# EAGLE board LandingGearSchematic_4 (EAGLE 9.5.1)
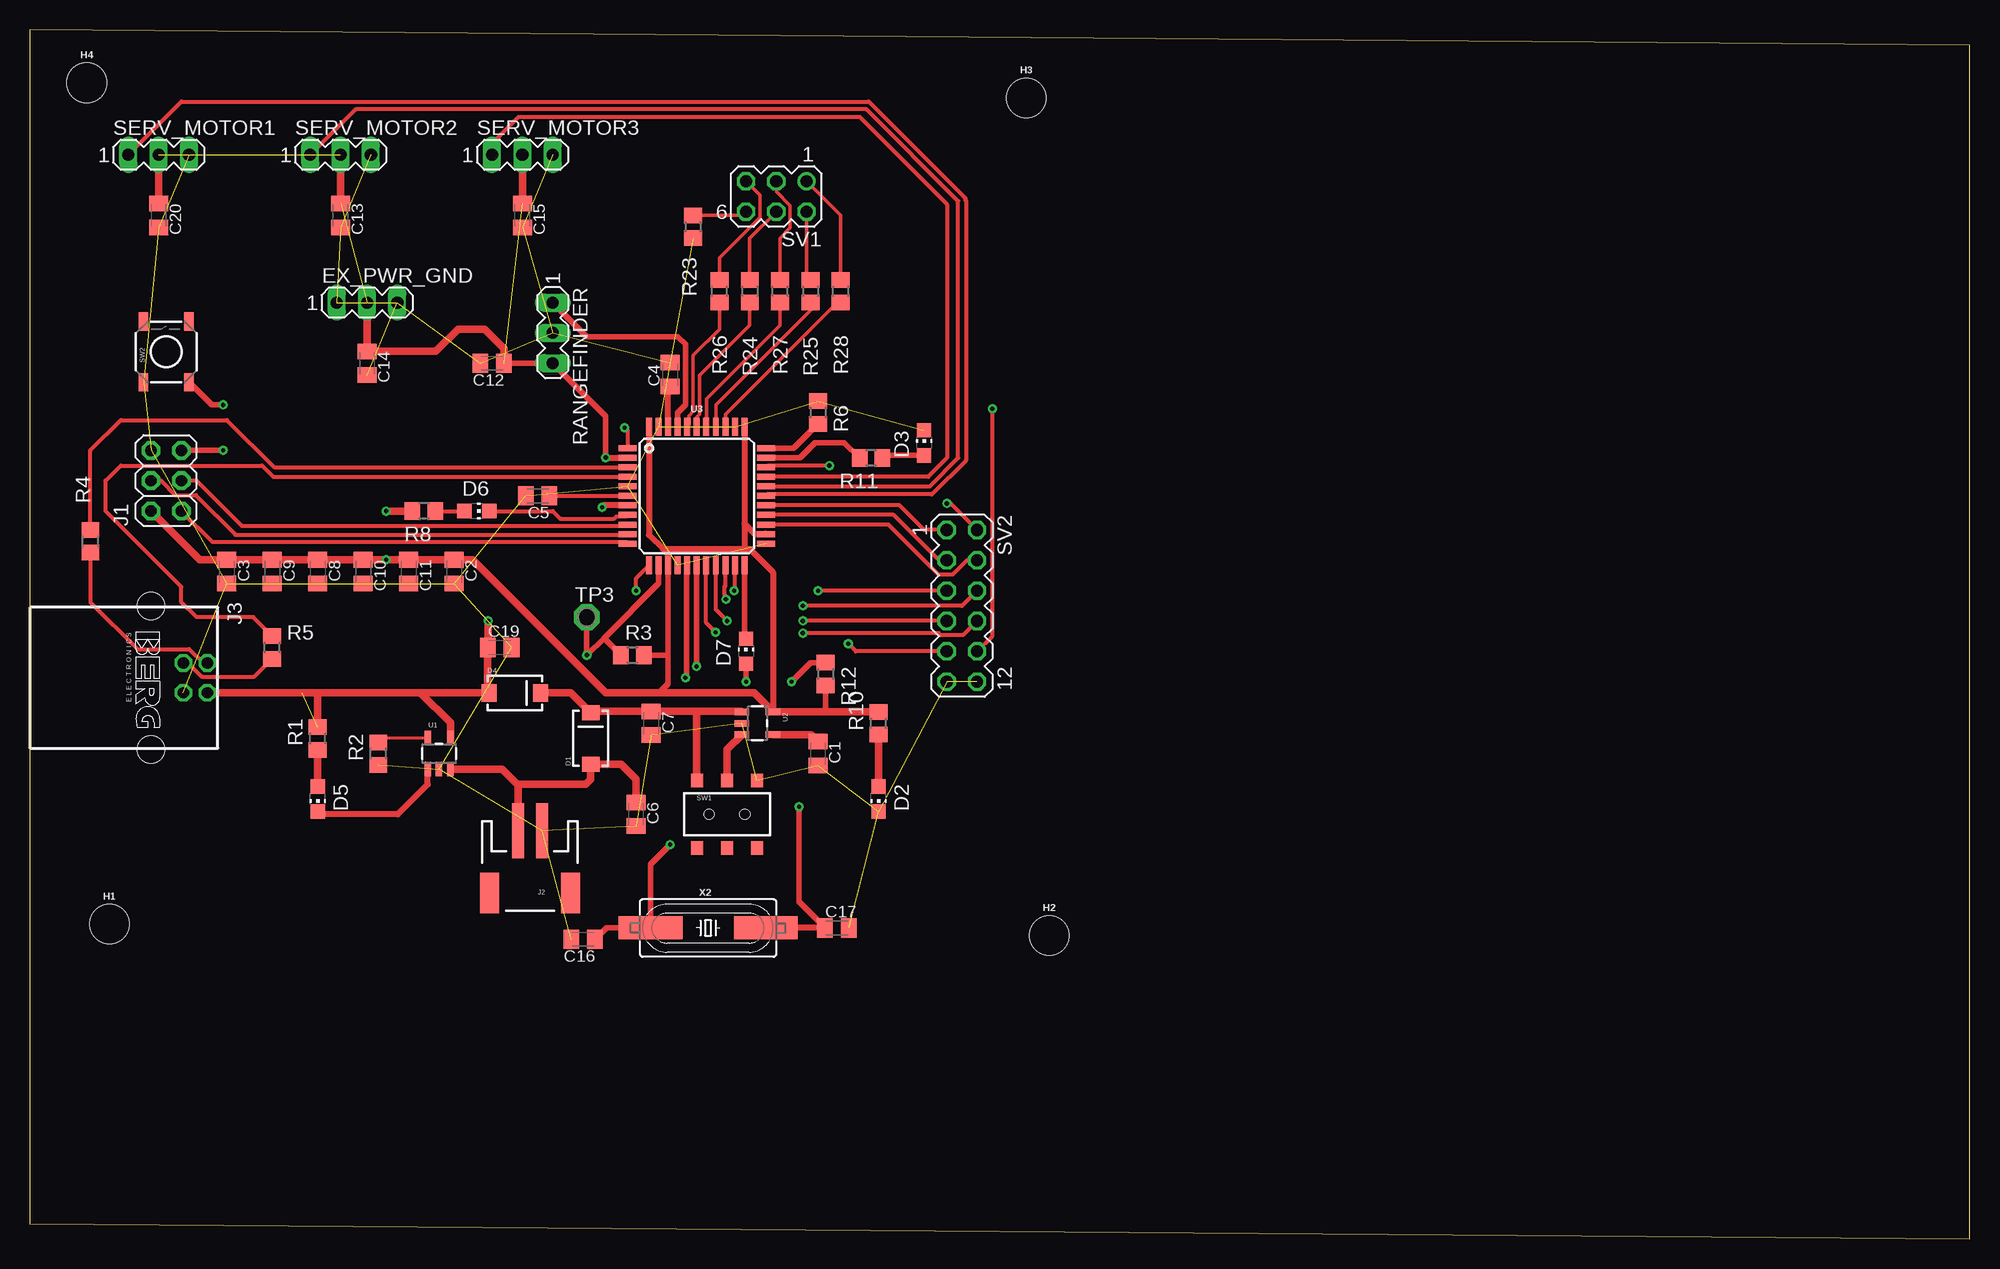
[diagram p0: board, top side]
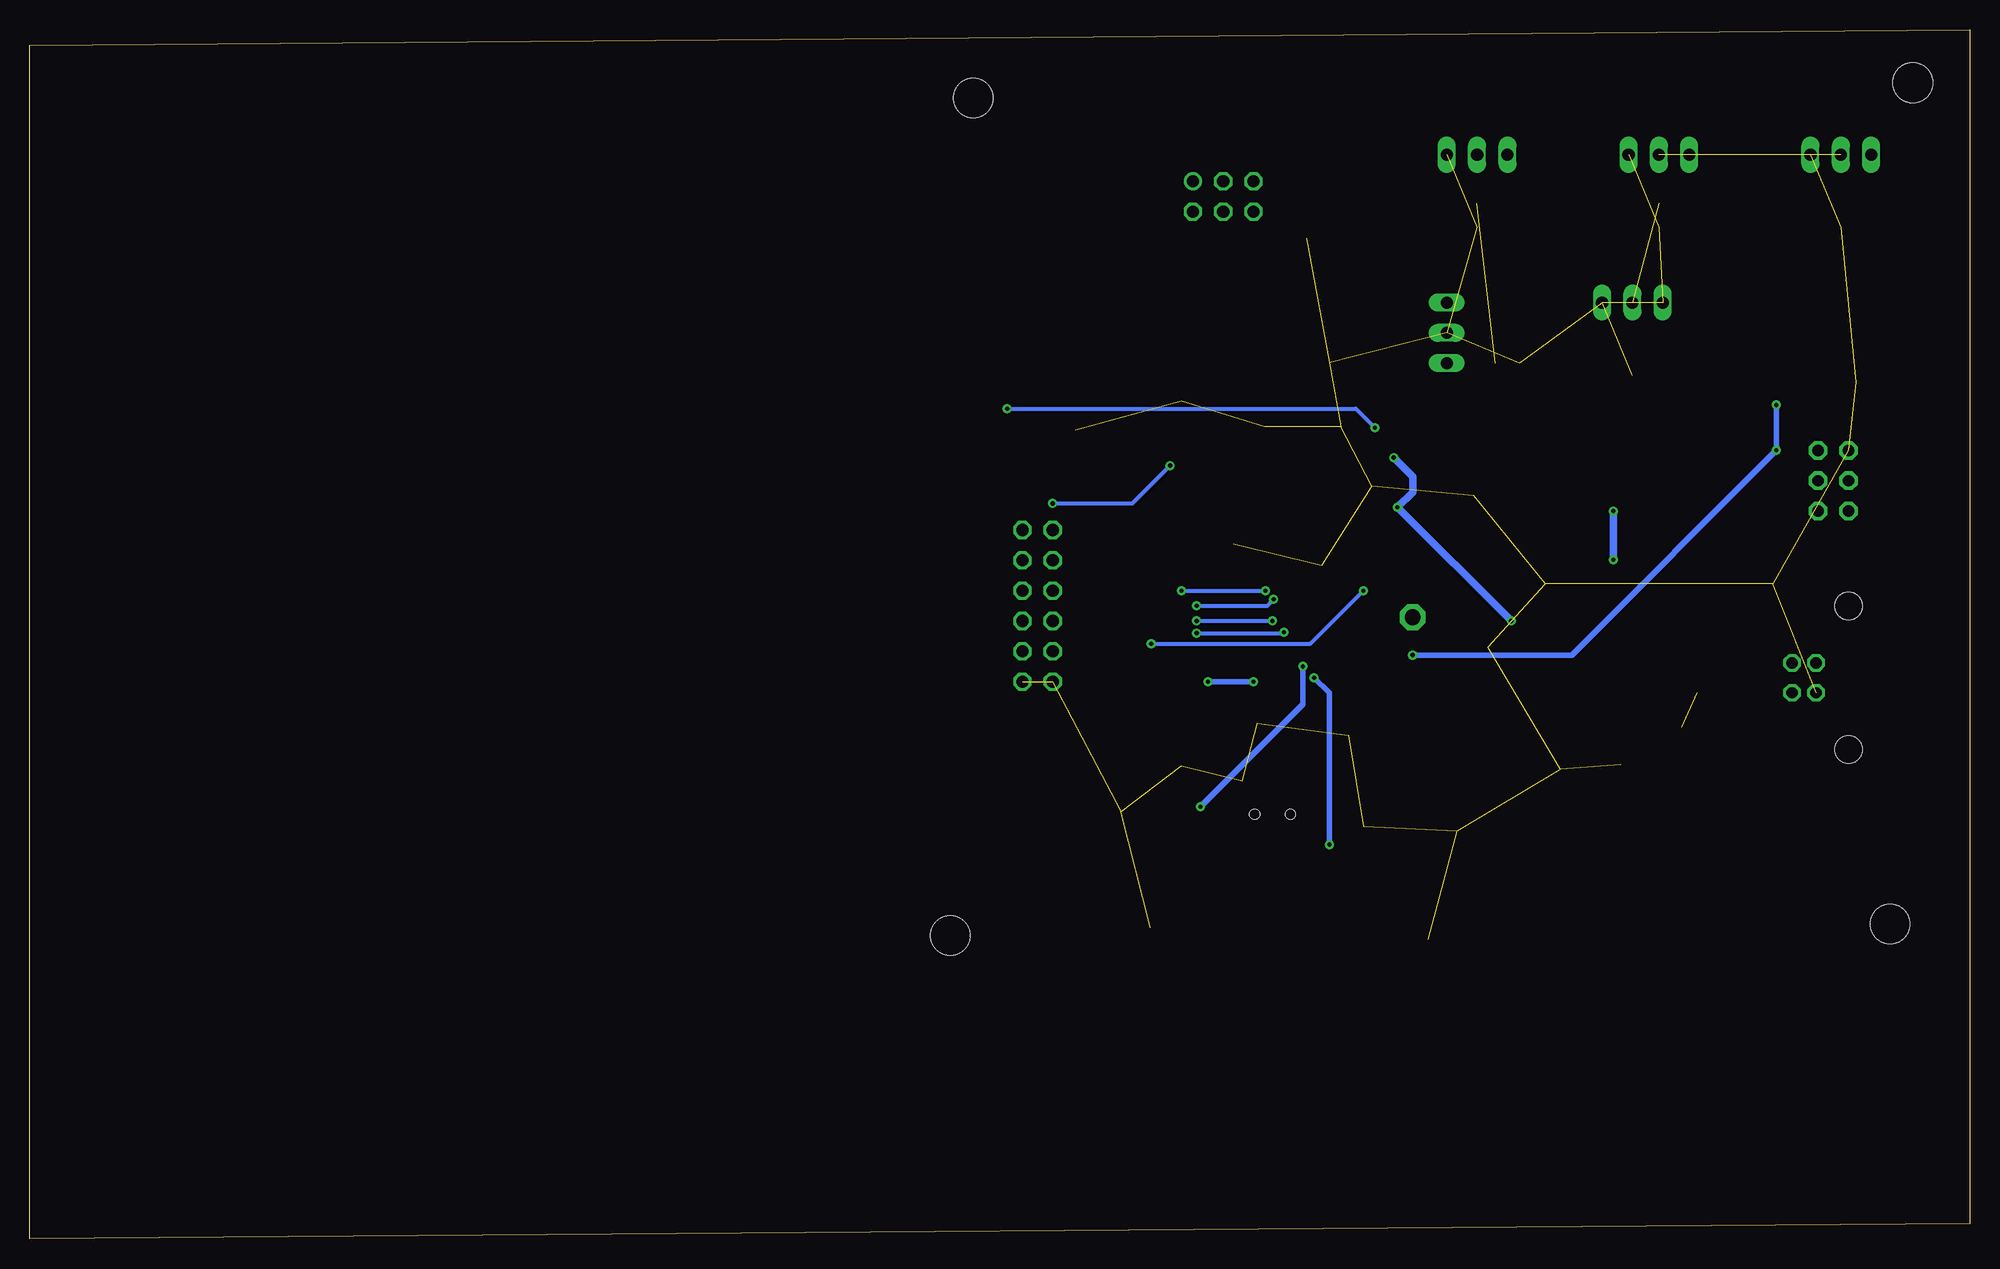
[diagram p1: board, bottom side, seen from below]

Size 162.54 x 101.27 mm. Coordinates in mm from the lower left corner, seen from the top.
Outline: 0,1.27 162.54,0 162.54,100 0,101.27 0,1.27
Copper layers (1*16): Top 0.035mm / dielectric 1.5mm / Bottom 0.035mm
Design rules "default": minimum track width 6mil, minimum drill 0.35mm, track to track 6mil, track to pad 6mil, pad to pad 6mil, via to via 6mil, smd to smd 6mil, copper to edge 40mil, drill to drill 6mil, minimum pad ring 10mil, minimum via ring 8mil, stop-mask expansion 4mil, vias tented up to drill 0mil, thermal gap 10mil
Net classes: 0 default: width 0.254 mm, clearance 0.254 mm; 1 power: width 0.61 mm, drill 0.61 mm, clearance 0.254 mm

## Footprints (pad centres in the part's own frame; a part is rotated, then mirrored left to right if it is on the bottom)
C0805K = smd 1.3 x 1.6: 1 -1,0; 2 1,0
SMA-DIODE = smd 1.27 x 1.47: A -2.15,0; C 2.15,0
CHIP-LED0805 = smd 1.2 x 1.2: A 0,-1.05; C 0,1.05
MA03-1 = drill 1.016 long: 1 -2.54,0; 2 0,0; 3 2.54,0
STAND-OFF = hole 3.302: 0,0
2X03 = drill 0.95 pad 1.55 octagon: 1 -2.54,-1.27; 2 -2.54,1.27; 3 0,-1.27; 4 0,1.27; 5 2.54,-1.27; 6 2.54,1.27
JST-2-SMD = smd 1 x 4.6: 1 -1,-3.7; 2 1,-3.7 | smd 1.6 x 3.4: NC1 -3.4,1.5; NC2 3.4,1.5
PN61729 = drill 0.95 octagon: 1 1.25,4.71; 2 -1.25,4.71; 3 -1.25,2.71; 4 1.25,2.71 | hole 2.3: -6.02,0; 6.02,0
R0805 = smd 1.3 x 1.5: 1 -0.95,0; 2 0.95,0
MA03-2 = drill 1.016: 1 -2.54,-1.27 | drill 1.016 octagon: 2 -2.54,1.27; 3 0,-1.27; 4 0,1.27; 5 2.54,-1.27; 6 2.54,1.27
MA06-2 = drill 1.016 octagon: 1 -6.35,-1.27; 2 -6.35,1.27; 3 -3.81,-1.27; 4 -3.81,1.27; 5 -1.27,-1.27; 6 -1.27,1.27; 7 1.27,-1.27; 8 1.27,1.27; 9 3.81,-1.27; 10 3.81,1.27; 11 6.35,-1.27; 12 6.35,1.27
AYZ0202 = smd 1 x 1.15: 1 -2.5,2.825; 2 0,2.825; 3 2.5,2.825; 4 -2.5,-2.825; 5 0,-2.825; 6 2.5,-2.825 | hole 0.85: 1.5,0; -1.5,0
TACTILE_SWITCH_SMD = smd 1.524 x 0.762: 1 -2.54,1.905; 2 2.54,1.905; 3 -2.54,-1.905; 4 2.54,-1.905
P1-13 = drill 1.321 pad 2.159 octagon: TP 0,0
SOT23-5 = smd 0.55 x 1.2: 1 -0.95,-1.3; 2 0,-1.3; 3 0.95,-1.3; 4 0.95,1.3; 5 -0.95,1.3
TQFP44 = smd 1.5 x 0.5: 1 -5.8,4; 2 -5.8,3.2; 3 -5.8,2.4; 4 -5.8,1.6; 5 -5.8,0.8; 6 -5.8,0; 7 -5.8,-0.8; 8 -5.8,-1.6; 9 -5.8,-2.4; 10 -5.8,-3.2; 11 -5.8,-4; 23 5.8,-4; 24 5.8,-3.2; 25 5.8,-2.4; 26 5.8,-1.6; 27 5.8,-0.8; 28 5.8,0; 29 5.8,0.8; 30 5.8,1.6; 31 5.8,2.4; 32 5.8,3.2; 33 5.8,4 | smd 0.5 x 1.5: 12 -4,-5.8; 13 -3.2,-5.8; 14 -2.4,-5.8; 15 -1.6,-5.8; 16 -0.8,-5.8; 17 0,-5.8; 18 0.8,-5.8; 19 1.6,-5.8; 20 2.4,-5.8; 21 3.2,-5.8; 22 4,-5.8; 34 4,5.8; 35 3.2,5.8; 36 2.4,5.8; 37 1.6,5.8; 38 0.8,5.8; 39 0,5.8; 40 -0.8,5.8; 41 -1.6,5.8; 42 -2.4,5.8; 43 -3.2,5.8; 44 -4,5.8
HC49UP = smd 5.334 x 1.93: 1 -4.826,0; 2 4.826,0

## Placement (x,y rotation side)
C1  470p  [C0805K]  66.04,40.64 270 top
C2  100n  [C0805K]  35.56,55.88 270 top
C3  100n  [C0805K]  16.51,55.88 270 top
C4  100n  [C0805K]  53.66,72.39 90 top
C5  1u  [C0805K]  42.55,62.23 180 top
C6  4.7u  [C0805K]  50.8,35.56 270 top
C7  4.7u  [C0805K]  52.07,43.18 270 top
C8  4.7u  [C0805K]  24.13,55.88 270 top
C9  100n  [C0805K]  20.32,55.88 270 top
C10  100n  [C0805K]  27.94,55.88 270 top
C11  100n  [C0805K]  31.75,55.88 270 top
C12  0.1u  [C0805K]  38.73,73.34 180 top
C13  0.1u  [C0805K]  26.04,85.72 270 top
C14  0.1u  [C0805K]  28.26,73.34 270 top
C15  0.1u  [C0805K]  41.27,85.72 270 top
C16  30p  [C0805K]  46.35,25.08 180 top
C17  30p  [C0805K]  67.63,26.04 0 top
C19  4.7u  [C0805K]  39.37,49.53 0 top
C20  0.1u  [C0805K]  10.79,85.72 270 top
D1  B340A  [SMA-DIODE]  46.99,41.91 90 top
D2  GREEN  [CHIP-LED0805]  71.12,36.83 180 top
D3  GREEN  [CHIP-LED0805]  74.93,66.67 0 top
D4  B340A  [SMA-DIODE]  40.64,45.72 0 top
D5  GREEN  [CHIP-LED0805]  24.13,36.83 180 top
D6  GREEN  [CHIP-LED0805]  37.47,60.96 270 top
D7  GREEN  [CHIP-LED0805]  60.01,49.21 0 top
EX_PWR_GND  [MA03-1]  28.26,78.42 0 top
H1  STAND-OFF  [STAND-OFF]  6.67,26.35 0 top
H2  STAND-OFF  [STAND-OFF]  85.41,25.4 0 top
H3  STAND-OFF  [STAND-OFF]  83.5,95.57 0 top
H4  STAND-OFF  [STAND-OFF]  4.76,96.84 0 top
J1  3x2 M  [2X03]  11.43,63.5 90 top
J2  S2B-PH-SM4-TB(LF)(SN)  [JST-2-SMD]  41.91,30.48 180 top
J3  [PN61729]  10.16,46.99 270 top
R1  1K  [R0805]  24.13,41.91 90 top
R2  10K  [R0805]  29.21,40.64 90 top
R3  10K  [R0805]  50.48,48.9 0 top
R4  22  [R0805]  5.08,58.42 90 top
R5  22  [R0805]  20.32,49.53 90 top
R6  10K  [R0805]  66.04,69.21 270 top
R8  1K  [R0805]  33.02,60.96 180 top
R10  1K  [R0805]  71.12,43.18 90 top
R11  1K  [R0805]  70.48,65.41 180 top
R12  1K  [R0805]  66.67,47.31 270 top
R23  0  [R0805]  55.56,84.77 270 top
R24  0  [R0805]  60.33,79.38 270 top
R25  0  [R0805]  65.41,79.38 270 top
R26  0  [R0805]  57.78,79.38 90 top
R27  0  [R0805]  62.87,79.38 90 top
R28  0  [R0805]  67.94,79.38 90 top
RANGEFINDER  [MA03-1]  43.81,75.88 270 top
SERV_MOTOR1  [MA03-1]  10.79,90.8 0 top
SERV_MOTOR2  [MA03-1]  26.04,90.8 0 top
SERV_MOTOR3  [MA03-1]  41.27,90.8 0 top
SV1  [MA03-2]  62.55,87.31 180 top
SV2  [MA06-2]  78.11,53.02 270 top
SW1  AYZ0202AGRLC  [AYZ0202]  58.42,35.56 0 top
SW2  !RESET  [TACTILE_SWITCH_SMD]  11.43,74.3 90 top
TP3  TPPAD1-13  [P1-13]  46.67,52.07 0 top
U1  MCP73831  [SOT23-5]  34.29,40.64 0 top
U2  MIC5219  [SOT23-5]  60.96,43.18 270 top
U3  ATMEGA32U4-AUR  [TQFP44]  55.88,62.23 0 top
X2  16 MHz  [HC49UP]  56.83,26.04 0 top

## Library data of the parts
C1 = rcl; DESC: CAP CER 470PF 50V X7R 0805; MFR: Samsung; MPN: CL21B471KBANNNC; SPICEPREFIX: C
C2-C4 C9-C11 = rcl; DESC: CAP CER 0.1UF 50V X7R 0805; MFR: Samsung; MPN: CL21B104KBCNNNC; SPICEPREFIX: C
C5 C12-C15 C20 = rcl; DESC: CAP CER 1UF 16V X7R 0805; MFR: Samsung; MPN: CL21B105KOFNNNG; SPICEPREFIX: C
C6-C8 C19 = rcl; DESC: CAP CER 4.7UF 16V X5R 0805; MFR: Samsung; MPN: CL21A475KOFNNNE; SPICEPREFIX: C
C16 = rcl; DESC: CAP CER 30PF 50V C0G/NP0 0805; MFR: Samsung; MPN: CL21C300JBANNNC; SPICEPREFIX: C
C17 = rcl; DESC: CAP CER 30PF 50V C0G/NP0 0805; MFR: Samsung; MPN: CL21C180JBANNNC; SPICEPREFIX: C
D1 D4 = SparkFun-DiscreteSemi; DESC: DIODE SCHOTTKY 40V 2A SMA; MFR: Diodes Inc; MPN: B340AE-13
D2 D3 D5-D7 = led; DESC: LED GREEN CLEAR 0805 SMD; MFR: Würth Elektronik; MPN: 150080GS75000
EX_PWR_GND RANGEFINDER SERV_MOTOR1-SERV_MOTOR3 SV1 SV2 = con-lstb; OC_FARNELL: unknown; OC_NEWARK: unknown
H1-H4 = SparkFun-Hardware
J1 = SmartPrj; DESC: CONN HEADER VERT 6POS 2ROW 2.54MM; MFR: Harwin; MPN: M20-9980345
J2 = SparkFun-Connectors; DESC: CONN HEADER SMD R/A 2POS 2MM; MFR: JST; MPN: S2B-PH-SM4-TB(LF)(SN)
J3 = con-berg; OC_FARNELL: unknown; OC_NEWARK: unknown
R1 R8 R10-R12 R23-R28 = rcl; DESC: RES SMD 1K OHM 1% 1/8W 0805; MFR: Yageo; MPN: RC0805FR-071KL; SPICEPREFIX: R
R2 R3 R6 = rcl; DESC: RES SMD 10K OHM 1% 1/8W 0805; MFR: Yageo; MPN: RC0805FR-0710KL; SPICEPREFIX: R
R4 R5 = rcl; DESC: RES SMD 22 OHM 1% 1/8W 0805; MFR: Yageo; MPN: RC0805FR-0722RL; SPICEPREFIX: R
SW1 = SparkFun-Electromechanical; DESC: SWITCH SLIDE DPDT 100MA 12V; MFR: C&K; MPN: AYZ0202AGRLC
SW2 = SparkFun-Electromechanical; DESC: SWITCH TACTILE SPST-NO 0.05A 12V; MFR: C&K; MPN: RS-187R05A2-DS MT RT
TP3 = testpad
U1 = SparkFun-PowerIC; DESC: IC CONTROLLR LI-ION 4.2V SOT23-5; MFR: Microchip; MPN: MCP73831T-2ACI/OT; PROD_ID: IC-09995
U2 = SparkFun-PowerIC; DESC: IC REG LINEAR 3.3V 500MA SOT23-5; MFR: Microchip; MPN: MIC5219-3.3YM5-TR
U3 = SparkFun-IC-Microcontroller; DESC: IC MCU 8BIT 32KB FLASH 44TQFP; MFR: Microchip; MPN: ATMEGA32U4-AUR; PROD_ID: IC-10828
X2 = SparkFun-Clocks; DESC: CRYSTAL 16.000 MHZ 18PF SMD; MFR: ECS; MPN: ECS-160-18-5PX-TR

## Nets
3.3V: C2.1 C3.1 C8.1 C9.1 C10.1 C11.1 J1.2 R3.2 R8.2 R10.2 R12.2 U2.5 U3.14 U3.24 U3.34 U3.44
!RESET: J1.5 R3.1 SW2.3 TP3.TP U3.13
AREF: C4.1 U3.42
D13#/USER_LED: R11.2 U3.32
D14/MISO: J1.1 U3.11
D15/SCK: J1.3 U3.9
D16/MOSI: J1.4 U3.10
D17/RX-LED: D6.C U3.8
D+: R5.2 U3.4
D-: R4.2 U3.3
GND: C1.2 C2.2 C3.2 C4.2 C5.2 C6.2 C7.2 C8.2 C9.2 C10.2 C11.2 C12.2 C13.2 C14.2 C15.2 C16.2 C17.2 C19.2 C20.2 D2.C D3.C EX_PWR_GND.1 EX_PWR_GND.3 J1.6 J2.1 J3.4 R2.1 R6.1 R23.2 RANGEFINDER.2 SERV_MOTOR1.3 SERV_MOTOR2.3 SERV_MOTOR3.3 SV2.11 SV2.12 SW1.3 SW2.1 U1.2 U2.2 U3.5 U3.15 U3.23 U3.35 U3.43
MCPPROG: R2.2 U1.5
MIC-BP: C1.1 U2.4
MIC-EN: SW1.2 U2.3
N$3: D5.A R1.1
N$4: D5.C U1.1
N$7: D2.A R10.1
N$13: D3.A R11.1
N$15: D6.A R8.1
N$16: D7.A R12.1
N$19: J3.2 R4.1
N$20: J3.3 R5.1
N$22: R23.1 SV1.6
NC_A0: R28.1 U3.36
NC_A0_R: R28.2 SV1.1
NC_A1: R25.2 U3.37
NC_A1_R: R25.1 SV1.2
NC_A2: R27.1 U3.38
NC_A2_R: R27.2 SV1.3
NC_A3: R24.2 U3.39
NC_A3_R: R24.1 SV1.4
NC_A4: R26.1 U3.40
NC_A4_R: R26.2 SV1.5
NC_D0: SV2.6 U3.20
NC_D1: SV2.5 U3.21
NC_D2: SV2.7 U3.19
NC_D3: SV2.8 U3.18
NC_D4: SV2.4 U3.25
NC_D5: SV2.2 U3.31
NC_D6: SV2.1 U3.27
NC_D7: SV2.10 U3.1
NC_D11: SV2.9 U3.12
NC_D12: SV2.3 U3.26
PE2/!HWB: R6.2 U3.33
PWRIN: C7.1 D1.C D4.C SW1.1 U2.1
RANGE_OUT: RANGEFINDER.1 U3.41
SERV1: SERV_MOTOR1.1 U3.28
SERV2: SERV_MOTOR2.1 U3.29
SERV3: SERV_MOTOR3.1 U3.30
TX_LED: D7.C U3.22
UCAP: C5.1 U3.6
V_BATT: C6.1 D1.A J2.2 U1.3
VBUS: C12.1 C13.1 C14.1 C15.1 C19.1 C20.1 D4.A EX_PWR_GND.2 J3.1 R1.2 RANGEFINDER.3 SERV_MOTOR1.2 SERV_MOTOR2.2 SERV_MOTOR3.2 U1.4 U3.2 U3.7
XTAL1: C17.1 U3.17 X2.2
XTAL2: C16.1 U3.16 X2.1

## Tracks (layer width: path | path; a pad name or v marks a point on that pad's centre or on a via)
3.3V  (via drill 0.35)
  Top 0.457: U3.14 53.48,48.9 | 53.48,48.9 53.48,46.5 52.7,45.72 | R12.2 66.67,44.13 | R3.2 53.48,48.9
  Top 0.508: U3.14 53.44,56.47 53.44,57.39 53.04,57.79 | U3.44 51.88,58.95 53.04,57.79 | U3.24 61.64,59.07 60.72,59.07 59.88,59.91 | U3.34 59.88,59.91 | 53.04,57.79 60.01,57.79 | 60.01,57.79 60.33,57.79 62.26,55.85 U2.5 | 59.88,59.91 59.88,57.91 60.01,57.79
  Top 0.61: J1.2 14.24,56.88 C3.1 C9.1 C8.1 C10.1 v29.84,56.88 C11.1 C2.1 37.1,56.88 48.26,45.72 52.7,45.72 60.67,45.72 U2.5 66.67,44.13 R10.2 | R8.2 v29.84,60.96
  Bottom 0.61: v29.84,60.96 v29.84,56.88
!RESET  (via drill 0.35)
  Top 0.457: J1.5 v16.19,66.04 | 48.1,50.32 52.68,54.9 U3.13 | 48.1,50.32 v46.67,48.9 TP3.TP | R3.1 48.1,50.32 | SW2.3 15.24,69.85 v16.19,69.85
  Bottom 0.457: v46.67,48.9 33.34,48.9 v16.19,66.04 v16.19,69.85
AREF
  Top 0.508: U3.42 53.48,71.21 C4.1
D13#/USER_LED
  Top 0.457: U3.32 64.54,65.43 65.81,66.7 68.24,66.7 R11.2
D14/MISO
  Top 0.356: U3.11 49.96,58.35 15.31,58.35 J1.1
D15/SCK
  Top 0.356: J1.3 13.97,63.5 17.78,59.69 47.86,59.69 47.88,59.71 49.96,59.71 U3.9
D16/MOSI
  Top 0.356: J1.4 10.99,63.5 12.2,62.29 13.91,62.29 17.24,58.96 50.01,58.96 U3.10
D17/RX-LED
  Top 0.356: D6.C 43.81,60.96 44.45,60.33 48.96,60.33 49.15,60.51 49.96,60.51 U3.8
D+
  Top 0.356: R5.2 18.73,52.07 13.97,52.07 12.7,53.34 12.7,54.61 6.35,60.96 6.35,63.5 7.62,64.77 19.46,64.77 20.4,63.83 U3.4
D-
  Top 0.356: R4.2 5.08,66.04 7.62,68.58 16.51,68.58 20.46,64.63 U3.3
GND  (43 unrouted)
MCPPROG
  Top 0.254: R2.2 29.55,41.93 29.53,41.94 U1.5
MIC-BP
  Top 0.61: C1.1 65.45,42.23 U2.4
MIC-EN
  Top 0.61: SW1.2 58.42,40.99 U2.3
N$3
  Top 0.61: D5.A R1.1
N$4
  Top 0.254: D5.C 24.35,35.56
  Top 0.508: U1.1 33.34,38.07 30.83,35.56 24.35,35.56
N$7
  Top 0.61: R10.1 D2.A
N$13
  Top 0.457: R11.1 71.66,65.62 D3.A
N$15
  Top 0.356: R8.1 D6.A
N$16  (via drill 0.35)
  Top 0.457: R12.1 65.4,48.26 v63.82,46.67 | v60.01,46.67 D7.A
  Bottom 0.457: v63.82,46.67 v60.01,46.67
N$19
  Top 0.356: R4.1 5.08,53.34 9.02,49.4 13.35,49.4 14.51,48.24 J3.2
N$20
  Top 0.356: J3.3 13.23,48.24 14.39,47.08 18.82,47.08 R5.1
N$22
  Top 0.305: SV1.6 59.69,85.72 R23.1
NC_A0
  Top 0.305: R28.1 67.63,78.42 58.28,69.08 U3.36
NC_A0_R
  Top 0.305: SV1.1 67.94,85.72 R28.2
NC_A1
  Top 0.305: U3.37 57.48,69.86 65.41,77.79 R25.2
NC_A1_R
  Top 0.305: SV1.2 65.09,80.64 R25.1
NC_A2
  Top 0.305: U3.38 56.68,68.82 56.69,68.84 56.69,70.35 62.87,76.52 R27.1
NC_A2_R
  Top 0.305: SV1.3 62.55,87.69 63.72,86.53 63.72,84.67 62.87,83.82 R27.2
NC_A3
  Top 0.305: U3.39 55.88,68.81 56.13,69.07 56.13,72.33 60.33,76.52 R24.2
NC_A3_R
  Top 0.305: R24.1 60.33,83.82 SV1.4
NC_A4
  Top 0.305: R26.1 57.78,76.2 55.58,73.99 55.58,69.3 55.22,68.95 55.22,68.17 U3.40
NC_A4_R
  Top 0.305: SV1.5 61.18,87.41 61.18,85.56 57.78,82.17 R26.2
NC_D0  (via drill 0.35)
  Top 0.356: SV2.6 78.11,53.02 v64.77,53.02 | v58.32,53.56 58.32,53.84 58.21,53.96 58.21,54.63 58.28,54.7 U3.20
  Bottom 0.356: v64.77,53.02 58.86,53.02 v58.32,53.56
NC_D1  (via drill 0.35)
  Top 0.356: SV2.5 v66.04,54.29 | v59.02,54.29 59.08,54.35 U3.21
  Bottom 0.356: v66.04,54.29 v59.02,54.29
NC_D2  (via drill 0.35)
  Top 0.356: SV2.7 v64.77,51.75 | v58.42,51.75 57.48,52.69 U3.19
  Bottom 0.356: v64.77,51.75 v58.42,51.75
NC_D3  (via drill 0.35)
  Top 0.356: v64.77,50.74 76.16,50.74 76.34,50.56 78.18,50.56 SV2.8 | v57.47,50.8 56.68,51.59 U3.18
  Bottom 0.356: v64.77,50.74 57.52,50.74 v57.47,50.8
NC_D4
  Top 0.356: SV2.4 78.52,56.83 77.33,55.64 76.12,55.64 71.93,59.83 U3.25
NC_D5  (via drill 0.35)
  Top 0.356: SV2.2 77.15,61.6 v76.83,61.6 | v66.99,64.77 66.97,64.75 61.8,64.75 U3.31
  Bottom 0.356: v76.83,61.6 70.17,61.6 v66.99,64.77
NC_D6
  Top 0.356: SV2.1 74.93,59.37 72.87,61.43 U3.27
NC_D7  (via drill 0.35)
  Top 0.356: SV2.10 80.64,50.48 v80.64,69.53 | v49.85,67.94 50.08,67.71 U3.1
  Bottom 0.356: v80.64,69.53 51.44,69.53 v49.85,67.94
NC_D11  (via drill 0.35)
  Top 0.356: SV2.9 69.22,49.21 v68.58,49.85 | v50.8,54.29 50.8,55.35 U3.12
  Bottom 0.356: v68.58,49.85 55.24,49.85 v50.8,54.29
NC_D12
  Top 0.356: SV2.3 76.2,56.83 72.39,60.64 61.69,60.64 U3.26
PE2/!HWB
  Top 0.457: U3.33 64,66.23 R6.2
PWRIN
  Top 0.254: D1.C 47.11,44.18
  Top 0.61: D4.C 45.33,45.72 D1.C | 47.11,44.18 C7.1 55.88,44.18 | 55.88,44.18 59.61,44.18 U2.1 | SW1.1 55.88,38.43 55.88,44.18
RANGE_OUT
  Top 0.457: RANGEFINDER.1 46.67,75.56 54.29,75.56 54.93,74.93 54.93,74.25 54.94,74.24 54.94,69.86 54.28,69.2 U3.41
SERV1
  Top 0.356: SERV_MOTOR1.1 12.7,95.25 70.32,95.25 78.4,87.17 78.4,87.02 78.42,86.99 78.42,65.18 75.59,62.35 61.8,62.35 U3.28
SERV2
  Top 0.356: U3.29 75.41,63.03 77.79,65.41 77.79,86.92 70.09,94.61 27.3,94.61 SERV_MOTOR2.1
SERV3
  Top 0.356: SERV_MOTOR3.1 38.73,91.76 40.96,93.98 69.53,93.98 76.83,86.68 76.83,65.41 75.26,63.83 U3.30
TX_LED
  Top 0.457: D7.C 59.88,50.39 U3.22
UCAP
  Top 0.356: C5.1 U3.6
V_BATT
  Top 0.61: J2.2 40.91,37.99 40.83,38.07 | 40.83,38.07 39.56,39.34 U1.3 | C6.1 50.8,38.49 49.53,39.76 D1.A 46.99,38.49 46.57,38.07 40.83,38.07
VBUS  (via drill 0.35)  (4 unrouted)
  Top 0.254: 38.47,45.74 D4.A 38.37,45.84
  Top 0.457: C12.1 RANGEFINDER.3 48.26,68.9 v48.26,65.44
  Top 0.508: U3.7 48.09,61.43 v47.94,61.28 | v48.26,65.44 U3.2
  Top 0.61: J3.1 24.13,45.74 R1.2 | 22.84,45.74 32.71,45.74 | U1.4 35.24,43.21 32.71,45.74 | 32.71,45.74 38.47,45.74 | 38.37,45.84 C19.1 38.42,49.58 v38.42,51.75 | C12.1 39.73,74.56 38.1,76.2 35.88,76.2 34.02,74.34 C14.1 EX_PWR_GND.2 | C20.1 SERV_MOTOR1.2 | C13.1 SERV_MOTOR2.2 | C15.1 SERV_MOTOR3.2
  Bottom 0.61: v38.42,51.75 v47.94,61.28 46.67,62.55 46.67,63.85 v48.26,65.44
XTAL1  (via drill 0.35)
  Top 0.457: C17.1 64.45,28.21 v64.45,36.2 | v55.88,47.94 U3.17
  Top 0.508: C17.1 X2.2
  Bottom 0.457: v64.45,36.2 55.88,44.77 v55.88,47.94
XTAL2  (via drill 0.35)
  Top 0.457: C16.1 48.31,26.04 X2.1 52.01,31.37 v53.66,33.02 | v54.93,46.99 55.01,47.08 55.01,56.36 U3.16
  Bottom 0.457: v53.66,33.02 53.66,45.72 v54.93,46.99